# Altium PCB 信号采集板.PcbDoc (part 3 of 4)
Units mil, origin at the board's own origin, x right, y up, seen from the top; angles counter-clockwise.
Board outline 5905.51 x 1775.59 mil, 2 copper layers (Top Layer, Bottom Layer); 203 components, 126 nets, 643 pads, 227 vias.
Unrouted connection lines stored in the file: 2.
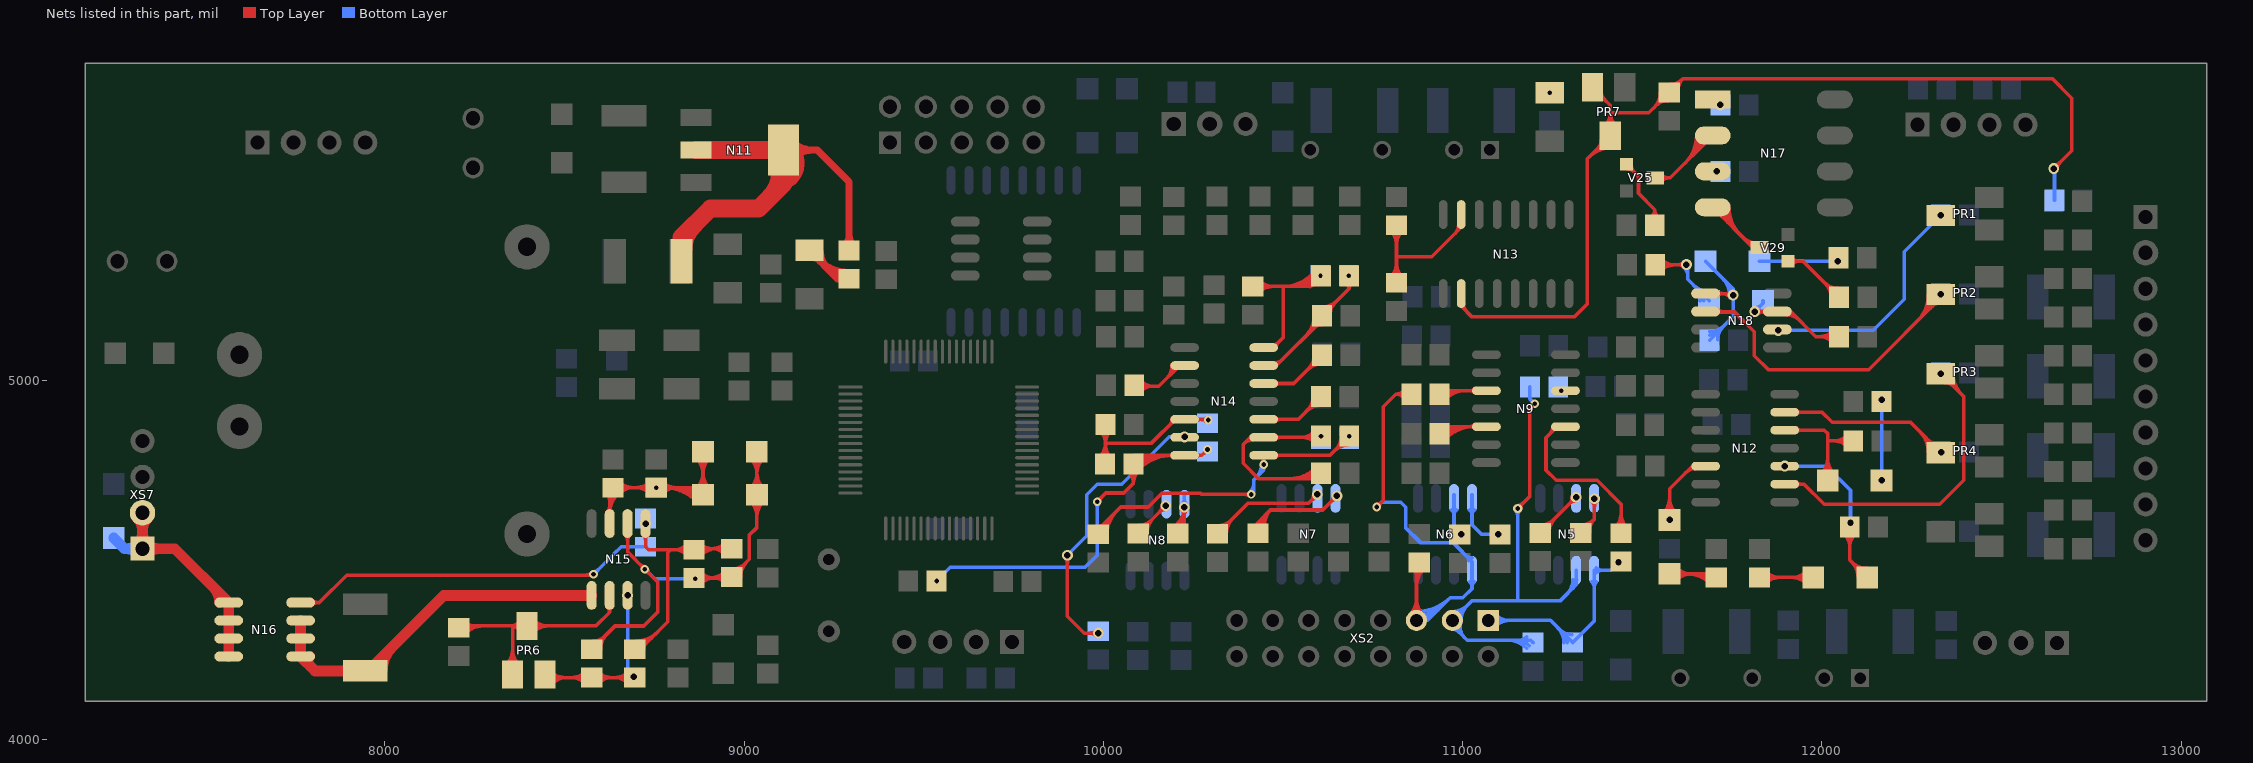
[diagram p3: the nets of this part, all layers, seen from the top]

## Via types
v1: diameter 24, hole 13, Top Layer to Bottom Layer, 112 vias
v2: diameter 30, hole 18, Top Layer to Bottom Layer, 58 vias
v3: diameter 25, hole 12, Top Layer to Bottom Layer, 22 vias
v4: diameter 26, hole 13, Top Layer to Bottom Layer, 17 vias
v5: diameter 35, hole 20, Top Layer to Bottom Layer, 12 vias
v6: diameter 40, hole 25, Top Layer to Bottom Layer, 2 vias
v7: diameter 30, hole 20, Top Layer to Bottom Layer, 2 vias
v8: diameter 25, hole 15, Top Layer to Bottom Layer, 2 vias

## Nets (pads, with @x,y where several pads share a name; then routed paths per layer and width w, separated by ;. In a path a pad name is that pad's centre, name@x,y a point inside that pad or via, vN(x,y) a via of type N, cw(c..) or ccw(c..) an arc to the next point about the centre after c; other vN are vias at no path point) (continued)
NetC47_1: C47.1 N14.2 R41.1 R43.1 | length 889.6
  Top Layer w10: 10390.18,4823.18 cw(c10418.16,4795.19) N14.2@10418.16,4834.77 ; N14.2@10479.11,4836.82 cw(c10491.06,4824.87) 10491.06,4841.77 cw(c10491.06,4858.67) N14.2@10479.11,4846.72 ; 10520.08,4727 ccw(c10520.08,4825.95) R41.1@10590.05,4755.98 ; 10544.22,4727 ccw(c10544.22,4801.81) R41.1@10597.12,4748.91 ; 10547.43,4841.77 ccw(c10547.43,4901.59) R43.1@10589.73,4859.29 ; 10555.01,4841.77 cw(c10555.01,4792.67) R43.1@10589.73,4827.39 ; 10568.36,4727 ccw(c10568.36,4777.67) R41.1@10604.19,4741.84 ; 10571.57,4841.77 ccw(c10571.57,4877.45) R43.1@10596.8,4852.22 ; R43.1@10580.24,4841.77 ccw(c10580.24,4870.75) R43.1@10600.74,4850.26 ; v1(10605.68,4845.31) 10602.15,4841.77 N14.2@10446.16,4841.77 10408.77,4841.77 10389,4822 10389,4770 10432,4727 10591,4727 R41.1@10606,4742
NetC47_2: C47.2 N14.1 R43.2 R46.1 | length 1419.2
  Top Layer w10: R46.1@9986,4572 9986,4585.54 10048.46,4648 10125.2,4648 10164,4686.8 10270,4686.8 10273.8,4683 10378,4683 v1(10412,4683) ; R46.1@9987.97,4594.56 ccw(c9987.97,4611.57) R46.1@10000,4599.54 ; R46.1@9990.53,4572 cw(c10034.15,4572) 10003.31,4602.85 ; R46.1@10000.53,4572 cw(c10068.3,4572) 10020.38,4619.92 ; R46.1@10010.53,4572 cw(c10102.44,4572) 10037.45,4636.99 ; v1@10407.05,4678.05 ccw(c10395.1,4666.1) 10395.1,4683 ccw(c10395.1,4699.9) v1@10407.05,4687.95 ; N14.1@10416.63,4791.77 N14.1@10446.16,4791.77 ; v1@10441.21,4771.11 ccw(c10429.26,4783.06) 10446.16,4783.06 ccw(c10463.06,4783.06) v1@10451.11,4771.11 ; N14.1@10441.21,4786.82 cw(c10429.26,4774.87) 10446.16,4774.87 cw(c10463.06,4774.87) N14.1@10451.11,4786.82 ; v1(10446.16,4766.16) N14.1@10446.16,4791.77 ; N14.1@10479.11,4786.82 cw(c10491.06,4774.87) 10491.06,4791.77 cw(c10491.06,4808.67) N14.1@10479.11,4796.72 ; 10642.55,4803.44 cw(c10684.43,4761.56) R43.2@10684.43,4820.78 ; 10647.31,4808.19 ccw(c10612.16,4843.34) R43.2@10661.87,4843.34 ; R43.2@10659.63,4820.51 cw(c10684.43,4795.71) R43.2@10684.43,4830.78 ; R43.2@10677.43,4845.31 cw(c10660.53,4845.31) 10672.48,4833.36 cw(c10684.43,4821.41) R43.2@10684.43,4838.31 ; v1(10684.43,4845.31) 10630.89,4791.77 N14.1@10446.16,4791.77
  Bottom Layer w10: v1@10407.05,4687.95 ccw(c10377.98,4717.02) 10419.09,4717.02 ; v1(10412,4683) 10419.09,4690.09 10419.09,4724.09 10446.16,4751.16 v1(10446.16,4766.16) ; v1@10414.12,4680.88 ccw(c10402.12,4692.88) 10419.09,4692.88 ; 10426.59,4731.59 ccw(c10395.89,4762.3) v1@10439.18,4765.63 ; 10441.97,4746.97 ccw(c10424.44,4764.49) v1@10449.15,4766.39
NetC48_1: C48.1 N13.15 R40.1 | length 704
  Top Layer w10: C48.1@10800.05,5287.95 ccw(c10761.54,5326.46) 10816,5326.46 ccw(c10870.46,5326.46) C48.1@10831.95,5287.95 ; R40.1@10800.05,5416.05 cw(c10761.54,5377.54) 10816,5377.54 cw(c10870.46,5377.54) R40.1@10831.95,5416.05 ; C48.1@10807.12,5280.88 ccw(c10785.68,5302.32) 10816,5302.32 ccw(c10846.32,5302.32) C48.1@10824.88,5280.88 ; R40.1@10807.12,5423.12 cw(c10785.68,5401.68) 10816,5401.68 cw(c10846.32,5401.68) R40.1@10824.88,5423.12 ; C48.1@10816,5272 10816,5344.28 ; R40.1@10816,5432 10816,5344.28 ; 10978.57,5408.82 ccw(c10953.4,5434) N13.15@10989,5434 ; N13.15@10996,5462 10996,5426.25 10914.03,5344.28 10816,5344.28
NetC49_2: C49.2 N13.2 PR7.1 PR7.W R84.2 | length 3335.3
  Top Layer w10: N13.2@10996,5242 10996,5207 11026,5177 11311,5177 11347.1,5213.1 11347.1,5617.1 PR7.W@11411,5681 11411,5745 ; N13.2@11003,5214 ccw(c11036.8,5214) 11012.9,5190.1 ; 11352.33,5622.33 cw(c11411,5563.65) PR7.W@11411,5646.63 ; PR7.1@11361,5816 11411,5766 11411,5745 ; PR7.1@11361.76,5791.65 cw(c11364.41,5741.33) 11400.04,5776.96 ; 11369.4,5639.4 cw(c11411,5597.8) PR7.W@11411,5656.63 ; 11376.09,5646.09 ccw(c11351.02,5671.16) PR7.W@11386.47,5671.16 ; PR7.1@11385.53,5806.16 ccw(c11420.98,5806.16) 11395.91,5781.09 ; PR7.W@11394.82,5709.28 ccw(c11363.48,5745) 11411,5745 ; PR7.W@11401.42,5701.76 ccw(c11382.85,5722.92) 11411,5722.92 ccw(c11439.15,5722.92) PR7.W@11420.58,5701.76 ; PR7.W@11427.18,5709.28 cw(c11458.52,5745) 11411,5745 ; 11533.13,5759.87 ccw(c11491.26,5801.74) R84.2@11550.47,5801.74 ; 11537.88,5764.62 cw(c11573.03,5729.47) R84.2@11573.03,5779.18 ; R84.2@11550.2,5776.94 ccw(c11525.4,5801.74) R84.2@11560.47,5801.74 ; R84.2@11576.97,5824.3 ccw(c11576.97,5874.01) 11612.12,5838.86 ; R84.2@11589.5,5802.5 cw(c11618.29,5804.25) R84.2@11597.9,5824.64 ; R84.2@11599.49,5803.11 cw(c11647.9,5806.05) 11613.6,5840.34 ; v2(12644.98,5589.72) 12695,5639.74 12695,5786 12640.65,5840.35 11613.61,5840.35 ; v2@12644.98,5599.72 ccw(c12644.98,5623.86) 12662.05,5606.79 ccw(c12679.12,5589.72) v2@12654.98,5589.72 ; 11411,5745 11518.26,5745 R84.2@11575,5801.74 11613.61,5840.35
  Bottom Layer w10: v2(12644.98,5589.72) 12647.26,5587.43 C49.2@12647.26,5502
NetC60_1: C60.1 N12.6 PR4.W | length 686.2
  Top Layer w10: N12.6@11896.16,4911.77 12000.09,4911.77 12028.2,4883.65 12246.28,4883.65 PR4.W@12330.84,4799.09 ; N12.6@11929.11,4906.82 cw(c11941.06,4894.87) 11941.06,4911.77 cw(c11941.06,4928.67) N12.6@11929.11,4916.72 ; 12272.17,4857.76 cw(c12213.5,4799.09) PR4.W@12296.47,4799.09 ; 12289.24,4840.69 cw(c12247.64,4799.09) PR4.W@12306.47,4799.09 ; 12295.93,4834 ccw(c12321,4859.07) PR4.W@12321,4823.61 ; PR4.W@12310.18,4819.75 ccw(c12331.35,4840.92) PR4.W@12331.35,4810.98 ; PR4.W@12315.98,4813.95 cw(c12303.01,4800.98) PR4.W@12321.35,4800.98
  Bottom Layer w20: C60.1@12330.33,4800.74 12331.12,4800.74 v2(12331.35,4800.98)
NetC61_1: C61.1 N14.12 R56.1 R59.1 | length 751.8
  Top Layer w10: R59.1@9989.22,4786.09 ccw(c9950.16,4826) 10006,4826 ; R56.1@9991.06,4859.12 cw(c9961.81,4826) 10006,4826 ; R59.1@9996.21,4778.94 ccw(c9973.44,4802.21) 10006,4802.21 ; R56.1@9997.69,4866.62 cw(c9981.4,4848.18) 10006,4848.18 cw(c10030.6,4848.18) R56.1@10014.31,4866.62 ; R59.1@10006,4792 10006,4826 ; 10006,4797.87 ccw(c10032.91,4797.87) R59.1@10013.88,4778.85 ; 10006,4822.02 ccw(c10057.05,4822.02) R59.1@10020.95,4785.92 ; R56.1@10006,4902 R56.1@10006,4878 10006,4826 ; R56.1@10020.94,4859.12 ccw(c10050.19,4826) 10006,4826 ; 10185.08,4877.08 ccw(c10170.39,4891.77) N14.12@10191.16,4891.77 ; 10188.95,4880.95 cw(c10198.16,4871.74) N14.12@10198.16,4884.77 ; N14.12@10259.11,4886.82 cw(c10271.06,4874.87) 10271.06,4891.77 cw(c10271.06,4908.67) N14.12@10259.11,4896.72 ; 10270.83,4891.77 cw(c10270.83,4868.83) v1@10287.05,4885.05 ; 10279.37,4891.77 ccw(c10279.37,4902.63) v1@10287.05,4894.95 ; v1(10292,4890) 10290.23,4891.77 N14.12@10226.16,4891.77 10199.77,4891.77 10134,4826 10006,4826
NetC61_2: C61.2 N14.14 R59.2 R61.1 | length 1596.4
  Top Layer w10: v1(9983,4663) 10007,4687 10057,4687 10083.74,4713.74 ; v1@9983,4670 ccw(c9983,4686.9) 9994.95,4674.95 ccw(c10006.9,4663) v1@9990,4663 ; R59.2@10068.26,4749.62 cw(c10034.42,4713.74) 10083.74,4713.74 ; R59.2@10075.12,4756.9 cw(c10056.28,4736.92) 10083.74,4736.92 cw(c10111.2,4736.92) R59.2@10092.36,4756.9 ; R59.2@10078,4771 R59.2@10085,4771 ; R59.2@10078.48,4775.23 cw(c10118.41,4735.3) 10118.41,4791.77 ; R59.2@10083.74,4768 10083.74,4713.74 ; R59.2@10084.74,4792 10084.97,4791.77 N14.14@10226.16,4791.77 10273.77,4791.77 v1(10290,4808) ; R59.2@10085.55,4768.16 cw(c10142.55,4711.16) 10142.55,4791.77 ; R59.2@10092.62,4761.09 cw(c10166.69,4687.02) 10166.69,4791.77 ; R59.2@10099.22,4749.62 ccw(c10133.06,4713.74) 10083.74,4713.74 ; R59.2@10099.69,4754.02 cw(c10190.83,4662.88) N14.14@10190.83,4791.77 ; N14.14@10193.21,4786.82 ccw(c10181.26,4774.87) 10181.26,4791.77 ccw(c10181.26,4808.67) N14.14@10193.21,4796.72 ; N14.14@10259.11,4786.82 cw(c10271.06,4774.87) 10271.06,4791.77 cw(c10271.06,4808.67) N14.14@10259.11,4796.72 ; v1@10283,4808 cw(c10266.1,4808) 10278.05,4796.05 cw(c10290,4784.1) v1@10290,4801
  Bottom Layer w10: v1(9536,4442) 9574,4480 9949,4480 9981.5,4512.5 9983,4514 v1(9983,4663) ; v1@9536,4449 ccw(c9536,4465.9) 9547.95,4453.95 ccw(c9559.9,4442) v1@9543,4442 ; v1@9978.05,4658.05 cw(c9966.1,4646.1) 9983,4646.1 cw(c9999.9,4646.1) v1@9987.95,4658.05
NetC62_1: C62.1 N14.6 R58.1 R60.1 | length 696.4
  Top Layer w10: N14.6@10446.16,5041.77 10481.6,5041.77 10608.44,5168.61 R58.1@10608.44,5180.19 10684.19,5255.94 ; N14.6@10474.16,5048.77 ccw(c10474.16,5083.61) 10498.8,5058.97 ; 10563.14,5123.31 ccw(c10508.23,5178.22) R58.1@10585.88,5178.22 ; 10580.21,5140.38 ccw(c10542.37,5178.22) R58.1@10595.88,5178.22 ; 10586.33,5146.5 cw(c10608.44,5124.39) R58.1@10608.44,5155.66 ; R58.1@10608.44,5194.72 ccw(c10608.44,5229.79) R58.1@10633.24,5204.99 ; R58.1@10608.44,5204.72 ccw(c10608.44,5263.93) 10650.31,5222.06 ; R58.1@10631,5182.16 cw(c10680.71,5182.16) 10645.56,5217.31 ; R60.1@10675.91,5268.1 cw(c10671.11,5255.94) 10684.19,5255.94 ; R60.1@10677.7,5286.7 cw(c10662.02,5271.02) R60.1@10684.19,5271.02 ; R60.1@10684.19,5276.76 cw(c10698.24,5276.76) R60.1@10688.3,5286.7 ; R60.1@10684.19,5291.06 10684.19,5255.94 ; R60.1@10692.47,5268.1 ccw(c10697.26,5255.94) 10684.19,5255.94
  other v3: 10683,5292
NetC62_2: C62.2 N14.7 R60.2 R63.1 | length 958.2
  Top Layer w10: R63.1@10416,5262 10500.65,5262 ; R63.1@10426.85,5253.12 cw(c10448.29,5231.68) 10448.29,5262 cw(c10448.29,5292.32) R63.1@10426.85,5270.88 ; R63.1@10433.92,5246.05 cw(c10472.43,5207.54) 10472.43,5262 cw(c10472.43,5316.46) R63.1@10433.92,5277.95 ; N14.7@10446.16,5091.77 10472.54,5091.77 10500.65,5119.87 10500.65,5262 ; N14.7@10474.16,5098.77 ccw(c10474.16,5111.75) 10483.34,5102.57 ; N14.7@10481.16,5091.77 cw(c10501.98,5091.77) 10487.26,5106.49 ; 10521.76,5262 ccw(c10521.76,5357.6) R60.2@10595.73,5297.04 ; 10542.87,5262 ccw(c10542.87,5340.32) R60.2@10603.47,5290.71 ; 10563.98,5262 ccw(c10563.98,5323.03) R60.2@10611.21,5284.37 ; R60.2@10583.2,5285.36 cw(c10555.68,5280.75) 10575.41,5261.02 cw(c10592.85,5243.58) R60.2@10599.43,5267.35 ; R60.2@10587.99,5303.38 cw(c10500.65,5374.88) 10500.65,5262 ; R60.2@10589.95,5275.55 ccw(c10573.5,5292) R60.2@10596.76,5292 ; R60.2@10595.1,5280.71 cw(c10604.26,5271.54) R60.2@10604.26,5284.5 ; R60.2@10605.45,5291.06 10576.39,5262 10500.65,5262
  other v3: 10604.26,5292
NetC63_1: C63.1 N12.2 PR3.W | length 1075.9
  Top Layer w10: N12.2@11896.16,4711.77 11950.23,4711.77 12006.69,4655.31 12327.42,4655.31 12394.35,4722.24 12394.35,4955.58 v2(12330.84,5019.09) ; N12.2@11929.11,4706.82 cw(c11941.06,4694.87) 11941.06,4711.77 cw(c11941.06,4728.67) N12.2@11929.11,4716.72 ; PR3.W@12330.84,5009.09 cw(c12330.84,4984.94) 12347.91,5002.02 cw(c12364.98,5019.09) PR3.W@12340.84,5019.09 ; PR3.W@12340.69,4994.56 cw(c12340.69,4959.11) 12365.75,4984.18 ; PR3.W@12355.21,5019.07 ccw(c12413.83,5019) 12372.38,4977.55 ; PR3.W@12365.21,5019.06 ccw(c12447.87,5018.95) 12389.42,4960.51
NetC65_1: C65.1 N18.2 PR1.W | length 702.3
  Top Layer w10: PR1.W@12330.84,5459.09 v2(12330.84,5460.23)
  Bottom Layer w10: v2(11878.6,5139.56) 12142.38,5139.56 12228.99,5226.17 12228.99,5358.38 v2(12330.84,5460.23) C65.1@12330.33,5460.74 ; C65.1@12320.84,5460.23 cw(c12296.7,5460.23) 12313.77,5443.16 cw(c12330.84,5426.09) C65.1@12330.84,5450.23
NetC66_1: C66.1 N15.3 R72.1 R73.1 V26.A V27.K | length 1715.7
  Top Layer w10: R72.1@8617.69,4685.81 cw(c8597.61,4665.74) 8626,4665.74 ; N15.3@8619.64,4634.36 ccw(c8604.27,4649.73) 8626,4649.73 ccw(c8647.73,4649.73) N15.3@8632.36,4634.36 ; N15.3@8626,4602 8626,4692.16 R72.1@8635.61,4701.76 ; N15.3@8626,4628.86 cw(c8706.54,4628.86) R72.1@8649.59,4685.81 ; 8626,4653 cw(c8682.4,4653) R72.1@8642.52,4692.88 ; R72.1@8646,4691.37 R72.1@8635.61,4701.76 ; R72.1@8646.46,4692.88 cw(c8667.89,4671.44) 8667.89,4701.76 cw(c8667.89,4732.08) R72.1@8646.46,4710.64 ; R72.1@8653.53,4685.81 cw(c8692.04,4647.3) 8692.04,4701.76 cw(c8692.04,4756.23) R72.1@8653.53,4717.72 ; R73.1@8737.32,4701.76 ccw(c8737.32,4720.68) R73.1@8750.7,4707.3 ; R73.1@8737.69,4685.81 ccw(c8699.18,4647.3) 8699.18,4701.76 ccw(c8699.18,4756.23) R73.1@8737.69,4717.72 ; R73.1@8738.46,4701.76 cw(c8738.46,4684.46) R73.1@8750.7,4696.7 ; R73.1@8744.76,4692.88 ccw(c8723.32,4671.44) 8723.32,4701.76 ccw(c8723.32,4732.08) R73.1@8744.76,4710.64 ; R73.1@8761.3,4696.7 cw(c8773.54,4684.46) R73.1@8773.54,4701.76 ; R73.1@8761.3,4707.3 ccw(c8774.68,4720.68) R73.1@8774.68,4701.76 ; R73.1@8766.46,4692.88 cw(c8787.89,4671.44) 8787.89,4701.76 cw(c8787.89,4732.08) R73.1@8766.46,4710.64 ; R73.1@8773.53,4685.81 cw(c8812.04,4647.3) 8812.04,4701.76 cw(c8812.04,4756.23) R73.1@8773.53,4717.72 ; R73.1@8777.17,4701.76 cw(c8777.17,4573.17) V27.K@8868.1,4664.1 ; 8801.31,4701.76 cw(c8801.31,4597.31) V27.K@8875.17,4671.17 ; 8825.45,4701.76 cw(c8825.45,4621.45) V27.K@8882.24,4678.24 ; 8849.6,4701.76 cw(c8849.6,4645.6) V27.K@8889.31,4685.31 ; V26.A@8867.71,4783.86 cw(c8823.54,4739.7) 8886,4739.7 ; V27.K@8868.1,4699.9 ccw(c8824.88,4743.12) 8886,4743.12 ccw(c8947.12,4743.12) V27.K@8903.9,4699.9 ; V26.A@8874.78,4790.93 cw(c8847.68,4763.84) 8886,4763.84 ; V27.K@8875.17,4692.83 ccw(c8849.03,4718.97) 8886,4718.97 ccw(c8922.97,4718.97) V27.K@8896.83,4692.83 ; V26.A@8885.61,4801.76 8886,4801.37 V27.K@8886,4682 8866.24,4701.76 R73.1@8755.61,4701.76 R72.1@8635.61,4701.76 ; 8886,4741.6 cw(c8945.77,4741.6) V26.A@8903.51,4783.86 ; 8886,4765.74 cw(c8921.63,4765.74) V26.A@8896.44,4790.93
  other v3: 8756,4702
NetC67_1: C67.1 C68.1 N15.1 R74.2 R75.1 | length 1258.1
  Top Layer w10: C67.1@8696,4252 8711.51,4252 8788.05,4328.54 8788.05,4404 8788.05,4521.21 8795.92,4529.09 ; C67.1@8697.97,4254.56 ccw(c8697.97,4293.43) C67.1@8725.46,4265.95 ; C67.1@8697.97,4264.56 ccw(c8697.97,4327.58) 8742.53,4283.02 ; C67.1@8697.97,4274.56 ccw(c8697.97,4361.72) 8759.6,4300.09 ; N15.1@8718.93,4594.93 cw(c8701.86,4577.86) 8726,4577.86 cw(c8750.14,4577.86) N15.1@8733.07,4594.93 ; N15.1@8719.64,4569.64 cw(c8704.27,4554.27) 8726,4554.27 cw(c8747.73,4554.27) N15.1@8732.36,4569.64 ; C67.1@8720.53,4252 cw(c8742.29,4252) 8726.9,4267.39 ; v2(8726,4602) 8726,4537.2 8734.11,4529.09 8795.92,4529.09 ; R75.1@8843.28,4513.13 ccw(c8804.77,4474.62) 8804.77,4529.09 ccw(c8804.77,4583.55) R75.1@8843.28,4545.04 ; R75.1@8850.35,4520.21 ccw(c8828.91,4498.77) 8828.91,4529.09 ccw(c8828.91,4559.41) R75.1@8850.35,4537.97 ; R75.1@8872.05,4520.21 cw(c8900.52,4491.73) 8900.52,4532 ; R75.1@8879.12,4513.13 cw(c8924.66,4467.59) 8924.66,4532 ; R75.1@8879.12,4545.04 ccw(c8910.59,4576.52) 8910.59,4532 ; C68.1@8948.08,4516.05 ccw(c8909.57,4477.54) 8909.57,4532 ccw(c8909.57,4586.46) C68.1@8948.08,4547.95 ; C68.1@8955.15,4523.12 ccw(c8933.71,4501.68) 8933.71,4532 ccw(c8933.71,4562.32) C68.1@8955.15,4540.88 ; C68.1@8966,4532 8864.11,4532 R75.1@8861.2,4529.09 8795.92,4529.09
NetC67_2: C67.2 N15.7 PR6.1 R79.2 | length 1073.5
  Top Layer w10: PR6.1@8446,4182 8454.74,4173.26 R79.2@8576,4173.26 C67.2@8696,4173.26 ; PR6.1@8456.27,4161.88 cw(c8483.73,4134.42) 8483.73,4173.26 ; PR6.1@8456.27,4182.43 ccw(c8478.41,4204.57) 8478.41,4173.26 ; PR6.1@8463.34,4154.81 cw(c8507.88,4110.28) 8507.88,4173.26 ; PR6.1@8463.34,4189.5 ccw(c8502.55,4228.71) 8502.55,4173.26 ; R79.2@8558.08,4157.31 ccw(c8519.57,4118.8) 8519.57,4173.26 ccw(c8519.57,4227.72) R79.2@8558.08,4189.21 ; R79.2@8565.15,4164.38 ccw(c8543.71,4142.94) 8543.71,4173.26 ccw(c8543.71,4203.58) R79.2@8565.15,4182.14 ; R79.2@8586.85,4164.38 cw(c8608.29,4142.94) 8608.29,4173.26 cw(c8608.29,4203.58) R79.2@8586.85,4182.14 ; R79.2@8593.92,4157.31 cw(c8632.43,4118.8) 8632.43,4173.26 cw(c8632.43,4227.72) R79.2@8593.92,4189.21 ; 8665.23,4173.26 ccw(c8665.23,4203.32) C67.2@8686.49,4182.06 ; C67.2@8673.6,4173.26 cw(c8673.6,4155.03) C67.2@8686.49,4167.92 ; C67.2@8678.08,4157.31 ccw(c8639.57,4118.8) 8639.57,4173.26 ccw(c8639.57,4227.72) C67.2@8678.08,4189.21 ; C67.2@8685.15,4164.38 ccw(c8663.71,4142.94) 8663.71,4173.26 ccw(c8663.71,4203.58) C67.2@8685.15,4182.14
  Bottom Layer w10: v2(8676,4402) 8676,4192.55 v2(8693.56,4174.99)
NetC68_2: C68.2 N15.2 R75.2 R79.1 V26.K V27.A | length 2241.9
  Top Layer w10: R79.1@8576,4252 8640.72,4316.72 8721.12,4316.72 8760.49,4356.09 8760.49,4438.77 v1(8724.13,4475.13) 8676,4523.26 N15.2@8676,4602 ; R79.1@8577.97,4274.56 ccw(c8577.97,4324.27) 8613.12,4289.12 ; R79.1@8590.53,4252 cw(c8625.6,4252) R79.1@8600.8,4276.8 ; R79.1@8600.53,4252 cw(c8659.74,4252) 8617.87,4293.87 ; N15.2@8669.64,4569.64 cw(c8654.27,4554.27) 8676,4554.27 cw(c8697.73,4554.27) N15.2@8682.36,4569.64 ; v1@8717.13,4475.13 ccw(c8700.23,4475.13) 8712.18,4487.08 ccw(c8724.13,4499.03) v1@8724.13,4482.13 ; v1@8724.13,4468.13 cw(c8724.13,4451.23) 8736.08,4463.18 cw(c8748.03,4475.13) v1@8731.13,4475.13 ; R75.2@8861.2,4450.35 8963.09,4450.35 C68.2@8966,4453.26 9015,4502.26 9015,4570 9036,4591 V27.A@9036,4682 9035.61,4682.39 V26.K@9035.61,4801.76 ; R75.2@8868.95,4443.05 cw(c8886.56,4425.44) R75.2@8886.56,4450.35 ; R75.2@8872.05,4441.47 cw(c8893.49,4420.03) 8893.49,4450.35 cw(c8893.49,4480.67) R75.2@8872.05,4459.23 ; R75.2@8879.12,4434.39 cw(c8917.63,4395.88) 8917.63,4450.35 cw(c8917.63,4504.81) R75.2@8879.12,4466.3 ; 8902.54,4450.35 ccw(c8902.54,4514.76) C68.2@8948.08,4469.21 ; 8916.6,4450.35 cw(c8916.6,4405.83) C68.2@8948.08,4437.31 ; 8926.68,4450.35 ccw(c8926.68,4490.61) C68.2@8955.15,4462.14 ; C68.2@8967.97,4475.82 ccw(c8967.97,4525.53) 9003.12,4490.38 ; C68.2@8980.53,4453.26 cw(c9015.6,4453.26) C68.2@8990.8,4478.06 ; C68.2@8990.53,4453.26 cw(c9049.74,4453.26) 9007.87,4495.13 ; V26.K@9017.71,4783.86 cw(c8974.49,4740.65) 9035.61,4740.65 cw(c9096.72,4740.65) V26.K@9053.51,4783.86 ; V27.A@9018.1,4664.1 cw(c8974.88,4620.88) 9036,4620.88 cw(c9097.12,4620.88) V27.A@9053.9,4664.1 ; V27.A@9018.1,4699.9 ccw(c8975.83,4742.17) 9035.61,4742.17 ; V26.K@9024.78,4790.93 cw(c8998.63,4764.79) 9035.61,4764.79 cw(c9072.58,4764.79) V26.K@9046.44,4790.93 ; V27.A@9025.17,4671.17 cw(c8999.03,4645.03) 9036,4645.03 cw(c9072.97,4645.03) V27.A@9046.83,4671.17 ; V27.A@9025.17,4692.83 ccw(c8999.98,4718.02) 9035.61,4718.02 ; 9035.61,4719.92 ccw(c9073.92,4719.92) V27.A@9046.83,4692.83 ; 9035.61,4744.07 ccw(c9098.07,4744.07) V27.A@9053.9,4699.9
  Bottom Layer w10: v1@8724.13,4468.13 cw(c8724.13,4451.23) 8736.08,4463.18 cw(c8748.03,4475.13) v1@8731.13,4475.13 ; v1(8724.13,4475.13) 8751.26,4448 v1(8864,4448) ; v1@8859.05,4443.05 ccw(c8847.1,4431.1) 8847.1,4448 ccw(c8847.1,4464.9) v1@8859.05,4452.95
NetC69_1: C69.1 N18.6 PR2.W | length 1136.2
  Top Layer w10: N18.6@11681.75,5190.74 11756.55,5190.74 11811.67,5135.62 11811.67,5069.33 11851,5030 12130,5030 12330.84,5230.84 PR2.W@12330.84,5239.09 ; N18.6@11708.36,5185.64 cw(c11720.69,5173.31) 11720.69,5190.74 ; N18.6@11708.36,5198.36 ccw(c11726.77,5216.77) 11726.77,5190.74 ; 12266.34,5166.34 ccw(c12193.59,5239.09) PR2.W@12296.47,5239.09 ; 12283.41,5183.41 ccw(c12227.73,5239.09) PR2.W@12306.47,5239.09 ; 12300.48,5200.48 ccw(c12261.88,5239.09) PR2.W@12316.47,5239.09 ; 12305.9,5205.9 ccw(c12271.06,5240.74) PR2.W@12320.33,5240.74 ; PR2.W@12310,5210 cw(c12321,5199.01) PR2.W@12321,5214.56 ; PR2.W@12322.97,5222.97 ccw(c12305.2,5240.74) v2(12330.33,5240.74)
NetL1_1: L1.1 N11.2 N11.4 R30.1 | length 1733.5
  Top Layer w20: N11.4@9110.09,5641.45 9203.87,5641.45 9292.38,5552.94 R30.1@9292.38,5362 ; N11.4@9133.65,5617.9 cw(c9190.51,5561.04) 9190.51,5641.45 cw(c9190.51,5721.86) N11.4@9133.65,5665 ; R30.1@9279.96,5374.42 ccw(c9249.99,5404.39) 9292.38,5404.39 ccw(c9334.77,5404.39) R30.1@9304.79,5374.42
  Top Layer w50: L1.1@8826,5332 8826,5397.98 8906.16,5478.14 9040.02,5478.14 9110.09,5548.22 N11.4@9110.09,5641.45 N11.2@8866,5641.45 ; L1.1@8831,5364.5 cw(c8923.91,5364.5) 8858.21,5430.2 ; 9072.85,5510.98 ccw(c9009.27,5574.56) N11.4@9093.04,5607.24 ; N11.4@9097.15,5600.94 cw(c9065.9,5569.69) 9110.09,5569.69 cw(c9154.29,5569.69) N11.4@9123.04,5600.94 ; N11.4@9097.15,5628.5 ccw(c9065.9,5597.25) 9065.9,5641.45 ccw(c9065.9,5685.65) N11.4@9097.15,5654.39 ; 9126.97,5565.1 ccw(c9087.14,5604.93) N11.4@9139.62,5625.41
NetN5_7: N5.7 R9.2 | length 311.4
  Top Layer w10: R9.2@11216.27,4576.09 11216.71,4576.09 v2(11315.61,4674.99) ; R9.2@11218.23,4588.65 ccw(c11218.23,4615.29) R9.2@11237.07,4596.46 ; R9.2@11218.23,4598.65 ccw(c11218.23,4649.43) 11254.14,4613.53 ; R9.2@11230.79,4576.09 cw(c11264.8,4576.09) R9.2@11240.75,4600.14 ; R9.2@11240.79,4576.09 cw(c11298.94,4576.09) 11257.82,4617.21 ; v2@11305.61,4674.99 cw(c11281.46,4674.99) 11298.54,4657.92 cw(c11315.61,4640.85) v2@11315.61,4664.99
NetN5_8: N5.8 R4.2 | length 252.1
  Top Layer w10: R4.2@11328.57,4576.09 11366.79,4614.31 ; R4.2@11330.54,4598.65 ccw(c11330.54,4648.36) 11365.69,4613.21 ; R4.2@11343.07,4576.95 cw(c11371.13,4578.88) R4.2@11351.24,4598.76 ; R4.2@11353.05,4577.64 cw(c11400.22,4580.87) 11366.79,4614.31 ; v2@11359.72,4663.98 cw(c11342.65,4646.91) 11366.79,4646.91 cw(c11390.93,4646.91) v2@11373.86,4663.98 ; v2(11366.79,4671.06) 11366.79,4614.31
NetN6_7: N6.7 R10.2 | length 190
  Bottom Layer w10: N6.7@10969.64,4639.64 cw(c10954.27,4624.27) 10976,4624.27 cw(c10997.73,4624.27) N6.7@10982.36,4639.64 ; N6.7@10976,4682 10976,4593.34 v2(10996.71,4572.63) ; v2@10986.71,4572.63 ccw(c10962.57,4572.63) 10979.64,4589.7 ccw(c10996.71,4606.77) v2@10996.71,4582.63
NetN6_8: N6.8 R7.2 | length 201.4
  Bottom Layer w10: N6.8@11019.64,4639.64 cw(c11004.27,4624.27) 11026,4624.27 cw(c11047.73,4624.27) N6.8@11032.36,4639.64 ; N6.8@11026,4682 11026,4598.46 11051.83,4572.63 v2(11099.07,4572.63)
NetN7_7: N7.7 R11.2 | length 473.6
  Top Layer w10: R11.2@10317.8,4573.73 10403.07,4659 10571.27,4659 v2(10595.13,4682.87) ; R11.2@10319.77,4596.29 ccw(c10319.77,4646) 10354.92,4610.85 ; R11.2@10332.33,4573.73 cw(c10367.4,4573.73) R11.2@10342.6,4598.53 ; R11.2@10342.33,4573.73 cw(c10401.55,4573.73) 10359.68,4615.6 ; v2@10585.13,4682.87 cw(c10560.99,4682.87) 10578.06,4665.8 cw(c10595.13,4648.72) v2@10595.13,4672.87
NetN7_8: N7.8 R5.2 | length 538
  Top Layer w10: R5.2@10424.06,4596.49 ccw(c10421.84,4604.46) 10430.11,4604.46 ; R5.2@10425.13,4572.09 cw(c10455.63,4583.79) 10432.53,4606.88 ; R5.2@10430.11,4574.76 10430.11,4604.46 ; R5.2@10434.47,4575.67 cw(c10471.37,4589.82) 10443.43,4617.77 ; R5.2@10436.17,4596.49 cw(c10438.39,4604.46) 10430.11,4604.46 ; R5.2@10443.81,4579.25 cw(c10487.12,4595.86) 10454.32,4628.67 ; R5.2@10453.14,4582.83 cw(c10502.87,4601.9) 10465.21,4639.56 ; v2@10640.25,4678.93 cw(c10616.11,4678.93) 10633.18,4661.86 cw(c10650.25,4644.79) v2@10650.25,4668.93 ; v2(10650.25,4678.93) 10610.88,4639.56 10465.21,4639.56 ; 10430.11,4604.46 10465.21,4639.56
NetN8_7: N8.7 R12.2 | length 259.5
  Top Layer w10: R12.2@10097.18,4574.6 v2(10173.87,4651.29) ; R12.2@10099.15,4597.16 ccw(c10099.15,4646.87) 10134.3,4611.72 ; R12.2@10111.71,4574.6 cw(c10146.78,4574.6) R12.2@10121.98,4599.4 ; R12.2@10121.71,4574.6 cw(c10180.92,4574.6) 10139.05,4616.47 ; v2@10163.87,4651.29 cw(c10139.73,4651.29) 10156.8,4634.22 cw(c10173.87,4617.15) v2@10173.87,4641.29
NetN8_8: N8.8 R8.2 | length 344.7
  Top Layer w10: R8.2@10196.43,4593.23 ccw(c10159.43,4647.43) v2(10225.06,4647.43) 10225.06,4592.47 R8.2@10207.18,4574.6 ; R8.2@10202.07,4584.97 ccw(c10172.36,4628.49) 10225.06,4628.49 ; R8.2@10207.71,4576.71 ccw(c10185.28,4609.56) 10225.06,4609.56 ; v2@10217.98,4640.36 cw(c10200.91,4623.29) 10225.06,4623.29 cw(c10249.2,4623.29) v2@10232.13,4640.36
  Bottom Layer w10: N8.8@10217.98,4654.5 ccw(c10200.91,4671.58) 10225.06,4671.58 ccw(c10249.2,4671.58) N8.8@10232.13,4654.5 ; v2(10225.06,4647.43) 10225.06,4681.06 N8.8@10226,4682
NetN9_3: N9.3 R25.1 | length 641.5
  Top Layer w10: 11242.96,4851.96 ccw(c11223.15,4871.77) N9.3@11251.16,4871.77 ; N9.3@11286.16,4871.77 11262.77,4871.77 11232,4841 11232,4750.72 11260.49,4722.24 11374.66,4722.24 11440.88,4656.02 R25.1@11440.88,4574.99 ; R25.1@11424.93,4590.94 ccw(c11386.42,4629.45) 11440.88,4629.45 ccw(c11495.34,4629.45) R25.1@11456.83,4590.94 ; R25.1@11432,4583.87 ccw(c11410.56,4605.31) 11440.88,4605.31 ccw(c11471.2,4605.31) R25.1@11449.76,4583.87
NetN9_5: N9.5 R36.1 | length 25
  Top Layer w10: N9.5@11270.8,4967.77 N9.5@11270.8,4971.77 ; v1(11274.8,4971.77) N9.5@11286.16,4971.77
  Bottom Layer w10: R36.1@11270.8,4971.77 11270.8,4967.77 v1(11274.8,4971.77)
NetN9_10: N9.10 R24.1 | length 291
  Top Layer w10: R24.1@10936,4962 10945.77,4971.77 N9.10@11066.16,4971.77 ; R24.1@10944.88,4955.09 cw(c10985.15,4914.82) 10985.15,4971.77 ; R24.1@10951.95,4948.02 cw(c11009.29,4890.67) 11009.29,4971.77 ; R24.1@10951.95,4979.92 ccw(c10971.63,4999.6) 10971.63,4971.77 ; N9.10@11033.21,4966.82 ccw(c11021.26,4954.87) 11021.26,4971.77 ccw(c11021.26,4988.67) N9.10@11033.21,4976.72
NetN9_12: N9.12 R35.1 | length 413.2
  Top Layer w10: R35.1@10930.74,4859.23 cw(c10961.01,4828.96) R35.1@10961.01,4871.77 ; R35.1@10936,4852 10955.77,4871.77 N9.12@11066.16,4871.77 ; R35.1@10937.81,4852.16 cw(c10985.15,4804.82) 10985.15,4871.77 ; R35.1@10944.88,4845.09 cw(c11009.29,4780.67) 11009.29,4871.77 ; R35.1@10951.95,4838.02 cw(c11033.44,4756.53) N9.12@11033.44,4871.77 ; N9.12@11033.21,4866.82 ccw(c11021.26,4854.87) 11021.26,4871.77 ccw(c11021.26,4888.67) N9.12@11033.21,4876.72
NetN12_3: N12.3 R62.2 V20.K | length 872.8
  Top Layer w10: R62.2@12061.31,4574.08 cw(c12022.8,4535.57) 12077.26,4535.57 cw(c12131.72,4535.57) R62.2@12093.21,4574.08 ; R62.2@12068.38,4581.15 cw(c12046.94,4559.71) 12077.26,4559.71 cw(c12107.58,4559.71) R62.2@12086.14,4581.15 ; R62.2@12072.31,4597.05 cw(c12060.38,4585.12) R62.2@12077.26,4585.12 ; R62.2@12077.26,4574.85 cw(c12108.66,4574.85) R62.2@12086.46,4597.05 ; R62.2@12077.26,4602 12077.26,4500.74 V20.K@12126,4452 ; V20.K@12100.69,4452 ccw(c12039.57,4452) 12082.78,4495.22 ccw(c12126,4538.43) V20.K@12126,4477.31 ; V20.K@12110.69,4452 ccw(c12073.71,4452) 12099.86,4478.14 ccw(c12126,4504.29) V20.K@12126,4467.31
  Bottom Layer w10: v2(11896.16,4761.77) 12012.29,4761.77 12079.39,4694.68 v2(12079.39,4604.13) ; v2@11903.23,4754.7 cw(c11920.31,4737.63) 11920.31,4761.77 cw(c11920.31,4785.91) v2@11903.23,4768.84 ; v2@12072.31,4611.2 ccw(c12055.24,4628.27) 12079.39,4628.27 ccw(c12103.53,4628.27) v2@12086.46,4611.2
NetN12_5: N12.5 R49.2 V16.K | length 635.8
  Top Layer w10: N12.5@11896.16,4861.77 12006.78,4861.77 12016,4852.55 V16.K@12016,4722 ; N12.5@11929.11,4856.82 cw(c11941.06,4844.87) 11941.06,4861.77 cw(c11941.06,4878.67) N12.5@11929.11,4866.72 ; V16.K@11998.1,4739.9 ccw(c11954.88,4783.12) 12016,4783.12 ccw(c12077.12,4783.12) V16.K@12033.9,4739.9 ; V16.K@12005.17,4732.83 ccw(c11979.03,4758.97) 12016,4758.97 ccw(c12052.97,4758.97) V16.K@12026.83,4732.83 ; 12019.46,4832 R49.2@12087.26,4832 ; R49.2@12071.31,4816.05 ccw(c12032.8,4777.54) 12032.8,4832 ccw(c12032.8,4886.46) R49.2@12071.31,4847.95 ; R49.2@12078.38,4823.12 ccw(c12056.94,4801.68) 12056.94,4832 ccw(c12056.94,4862.32) R49.2@12078.38,4840.88
NetN12_12: N12.12 R38.2 V10.K | length 436.7
  Top Layer w10: V10.K@11558.1,4629.9 ccw(c11514.88,4673.12) 11576,4673.12 ccw(c11637.12,4673.12) V10.K@11593.9,4629.9 ; V10.K@11565.17,4622.83 ccw(c11539.03,4648.97) 11576,4648.97 ccw(c11612.97,4648.97) V10.K@11586.83,4622.83 ; V10.K@11568.93,4619.07 ccw(c11551.86,4636.14) 11576,4636.14 ccw(c11600.14,4636.14) V10.K@11583.07,4619.07 ; v2(11576,4612) 11576,4699.17 11638.6,4761.77 N12.12@11676.16,4761.77 ; 11619.89,4743.06 cw(c11648.16,4714.79) N12.12@11648.16,4754.77
NetN14_3: N14.3 R48.1 | length 325.5
  Top Layer w10: N14.3@10446.16,4891.77 10542.15,4891.77 R48.1@10605.68,4955.31 ; N14.3@10479.11,4886.82 cw(c10491.06,4874.87) 10491.06,4891.77 cw(c10491.06,4908.67) N14.3@10479.11,4896.72 ; 10563.81,4913.44 cw(c10605.68,4871.56) R48.1@10605.68,4930.78 ; 10568.57,4918.19 ccw(c10533.42,4953.34) R48.1@10583.13,4953.34 ; R48.1@10580.88,4930.51 cw(c10605.68,4905.71) R48.1@10605.68,4940.78
NetN14_5: N14.5 R65.1 | length 334.4
  Top Layer w10: N14.5@10446.16,4991.77 10530.02,4991.77 R65.1@10608.44,5070.19 ; N14.5@10479.11,4986.82 cw(c10491.06,4974.87) 10491.06,4991.77 cw(c10491.06,5008.67) N14.5@10479.11,4996.72 ; 10566.57,5028.32 cw(c10608.44,4986.45) R65.1@10608.44,5045.66 ; 10571.32,5033.07 ccw(c10536.17,5068.22) R65.1@10585.88,5068.22 ; R65.1@10583.64,5045.39 cw(c10608.44,5020.59) R65.1@10608.44,5055.66
NetN14_9: N14.9 R47.1 | length 357.6
  Top Layer w10: R47.1@10086,4984 10154,4984 10211.77,5041.77 N14.9@10226.16,5041.77 ; R47.1@10094.88,4976.15 cw(c10113.83,4957.2) 10113.83,4984 ; R47.1@10094.88,4993.91 ccw(c10118.81,5017.84) 10118.81,4984 ; R47.1@10101.95,4969.08 cw(c10137.97,4933.06) 10137.97,4984 ; R47.1@10101.95,5000.98 ccw(c10142.95,5041.98) 10142.95,4984 ; 10176.59,5006.59 ccw(c10141.42,5041.77) N14.9@10191.16,5041.77 ; 10193.66,5023.66 ccw(c10175.56,5041.77) N14.9@10201.16,5041.77 ; N14.9@10210.74,5040.74 ccw(c10209.7,5041.77) N14.9@10211.16,5041.77
NetN14_13: N14.13 R64.1 | length 919.9
  Top Layer w10: v2@9892.93,4506.93 cw(c9875.86,4489.86) 9900,4489.86 cw(c9924.14,4489.86) v2@9907.07,4506.93 ; v2(9900,4514) 9900,4344 9947,4297 v2(9986,4297) ; v2@9978.93,4289.93 ccw(c9961.86,4272.86) 9961.86,4297 ccw(c9961.86,4321.14) v2@9978.93,4304.07 ; N14.13@10226.16,4841.77 v2(10226.16,4843.18)
  Bottom Layer w10: v2(9900,4514) 9954,4568 9954,4682 9983,4711 10051.04,4711 10183.22,4843.18 v2(10226.16,4843.18) ; v2@10219.09,4836.1 ccw(c10202.02,4819.03) 10202.02,4843.18 ccw(c10202.02,4867.32) v2@10219.09,4850.25
NetN15_5: N15.5 N16.1 N16.2 N16.3 R77.1 | length 1174.3
  Top Layer w30: N16.3@7766,4332 N16.2@7766,4282 N16.1@7766,4232 7806,4192 R77.1@7946,4192 7954.66,4192 8164.66,4402 N15.5@8576,4402 ; N16.1@7791.21,4232.61 ccw(c7807.82,4219.83) 7793,4205 ; R77.1@7902.89,4181.39 ccw(c7877.29,4155.79) 7877.29,4192 ccw(c7877.29,4228.21) R77.1@7902.89,4202.61 ; R77.1@7993.5,4192 cw(c8087.26,4192) 8020.96,4258.3
NetN15_6: N15.6 PR6.2 PR6.W R81.1 | length 1122.6
  Top Layer w10: R81.1@8206,4312 8211,4317 8351.04,4317 ; R81.1@8216.85,4303.12 cw(c8250.36,4269.61) 8250.36,4317 cw(c8250.36,4354.39) R81.1@8223.92,4327.95 ; R81.1@8223.92,4296.05 cw(c8274.5,4245.47) 8274.5,4317 ; PR6.2@8338.66,4209.19 ccw(c8296.79,4251.06) 8356,4251.06 ccw(c8415.21,4251.06) PR6.2@8373.34,4209.19 ; PR6.2@8345.73,4202.11 ccw(c8320.93,4226.91) 8356,4226.91 ccw(c8391.07,4226.91) PR6.2@8366.27,4202.11 ; PR6.2@8356,4182 8356,4312.04 ; PR6.W@8375.38,4303.72 ccw(c8351.04,4288.06) 8351.04,4317 ; PR6.W@8375.38,4330.28 cw(c8351.04,4345.94) 8351.04,4317 ; PR6.W@8406.27,4306.73 cw(c8431.07,4281.93) 8431.07,4317 cw(c8431.07,4352.07) PR6.W@8406.27,4327.27 ; PR6.W@8413.34,4299.66 cw(c8455.21,4257.79) 8455.21,4317 cw(c8455.21,4376.21) PR6.W@8413.34,4334.34 ; N15.6@8619.9,4369.38 cw(c8607.07,4355.47) 8626,4355.47 ; N15.6@8626,4402 8626,4355.46 ; N15.6@8632.1,4369.38 ccw(c8644.93,4355.47) 8626,4355.47 ; 8351.04,4317 PR6.W@8396,4317 8587.54,4317 8626,4355.46
NetN16_4: N16.4 R74.1 | length 1130.2
  Top Layer w10: N16.4@7766,4382 7817.89,4382 7894.35,4458.46 8539,4458.46 v1@8579.39,4458.46 ; N16.4@7798.36,4375.64 cw(c7813.73,4360.27) 7813.73,4382 cw(c7813.73,4403.73) N16.4@7798.36,4388.36 ; 8557.96,4458.46 ccw(c8557.96,4484.04) v1@8576.05,4465.95
  Bottom Layer w10: v1(8581,4461) 8581.93,4461 8658.13,4537.2 ; v1@8581,4468 ccw(c8581,4487.14) 8594.54,4473.61 ; v1@8588,4461 cw(c8602.66,4461) 8592.29,4471.36 ; 8638.44,4517.51 8658.13,4537.2 ; R74.1@8726,4537.2 8658.13,4537.2
NetN16_5: N16.5 N16.6 N16.7 N16.8 V23.A XS7.1 XS7.2 | length 979.5
  Top Layer w30: XS7.2@7311.55,4617.55 cw(c7276.67,4582.67) 7326,4582.67 cw(c7375.33,4582.67) XS7.2@7340.45,4617.55 ; XS7.1@7312.94,4545.06 ccw(c7281.42,4576.58) 7326,4576.58 ccw(c7370.58,4576.58) 7339.06,4545.06 ccw(c7370.58,4576.58) 7370.58,4532 ccw(c7370.58,4487.42) XS7.1@7339.06,4518.94 ; XS7.2@7326,4632 XS7.1@7326,4532 7416,4532 N16.5@7566,4382 N16.6@7566,4332 N16.7@7566,4282 N16.8@7566,4232 ; 7523.32,4424.68 cw(c7480.64,4382) N16.5@7541,4382
  Bottom Layer w30: V23.A@7246,4562 7276,4532 XS7.1@7326,4532 ; XS7.1@7312.94,4518.94 ccw(c7281.42,4487.42) 7281.42,4532 ccw(c7281.42,4576.58) XS7.1@7312.94,4545.06
NetN17_1: N17.1 R66.2 | length 36.3
  Top Layer w10: N17.1@11696,5782 11717.26,5782 v2(11717.26,5767)
NetN17_2: N17.2 V25.3 | length 485.7
  Top Layer w10: V25.3@11536,5564 11578,5564 N17.2@11696,5682 ; V25.3@11552.19,5554.81 cw(c11574.38,5532.62) 11574.38,5564 cw(c11574.38,5595.38) V25.3@11552.19,5573.19 ; 11619.18,5605.18 ccw(c11542.36,5682) N17.2@11651,5682 ; 11636.25,5622.25 ccw(c11576.5,5682) N17.2@11661,5682 ; 11653.32,5639.32 ccw(c11610.64,5682) N17.2@11671,5682 ; 11670.39,5656.39 ccw(c11644.79,5682) N17.2@11681,5682
NetN17_3: N17.3 R76.2
  other v2: 11707.26,5582
NetN17_4: N17.4 V29.3 | length 476
  Top Layer w10: N17.4@11696,5482 11808,5370 V29.3@11826,5370 ; N17.4@11711,5482 ccw(c11747.21,5482) 11721.61,5456.39 ; N17.4@11721,5482 ccw(c11781.36,5482) 11738.68,5439.32 ; N17.4@11731,5482 ccw(c11815.5,5482) 11755.75,5422.25 ; N17.4@11741,5482 ccw(c11849.64,5482) 11772.82,5405.18 ; 11778.03,5399.97 ccw(c11819,5440.94) V29.3@11819,5383 ; 11795.1,5382.9 ccw(c11819,5406.8) V29.3@11819,5373
NetN18_3: N18.3 R70.2 V24.K | length 602.1
  Top Layer w10: v2(11812.93,5192) N18.3@11876,5192 11912.77,5192 11982.77,5122 R70.2@12047.26,5122 ; v2@11820,5184.93 cw(c11837.07,5167.86) 11837.07,5192 cw(c11837.07,5216.14) v2@11820,5199.07 ; N18.3@11843.64,5185.64 ccw(c11828.27,5170.27) 11828.27,5192 ccw(c11828.27,5213.73) N18.3@11843.64,5198.36 ; N18.3@11902,5183 cw(c11902,5135.27) 11935.75,5169.02 ; N18.3@11902,5193 cw(c11902,5169.41) 11918.68,5186.09 ; R70.2@12031.31,5106.05 ccw(c11992.8,5067.54) 11992.8,5122 ccw(c11992.8,5176.46) R70.2@12031.31,5137.95 ; R70.2@12038.38,5113.12 ccw(c12016.94,5091.68) 12016.94,5122 ccw(c12016.94,5152.32) R70.2@12038.38,5130.88
  Bottom Layer w10: v2(11812.93,5192) 11836,5215.07 V24.K@11836,5222 ; V24.K@11812.93,5202 ccw(c11812.93,5226.14) 11830,5209.07 ccw(c11847.07,5192) V24.K@11822.93,5192
NetN18_5: N18.5 R80.2 V28.K | length 613.3
  Top Layer w10: N18.5@11676,5242 v2@11748.6,5242 ; N18.5@11708.36,5235.64 cw(c11723.73,5220.27) 11723.73,5242 cw(c11723.73,5263.73) N18.5@11708.36,5248.36 ; 11718.78,5242 cw(c11718.78,5204.15) v2@11745.54,5230.91
  Bottom Layer w10: V28.K@11676,5332 11752.61,5255.39 v2(11752.61,5237.98) ; R80.2@11687.26,5112 11752.61,5177.35 v2(11752.61,5237.98) ; R80.2@11687.26,5126.53 ccw(c11687.26,5161.6) R80.2@11712.06,5136.8 ; R80.2@11687.26,5136.53 ccw(c11687.26,5195.74) 11729.13,5153.87 ; R80.2@11709.82,5113.97 cw(c11759.53,5113.97) 11724.38,5149.12 ; 11723.24,5284.76 cw(c11676.46,5237.98) v2@11742.61,5237.98 ; 11740.31,5267.69 cw(c11710.6,5237.98) v2(11752.61,5237.98)
NetR30_2: R30.2 V7.1 | length 392
  Top Layer w20: V7.1@9182.38,5362 9261.12,5283.26 ; V7.1@9191.75,5342 cw(c9191.75,5316.34) V7.1@9209.89,5334.48 ; V7.1@9210.43,5333.95 ccw(c9290.41,5413.93) R30.2@9290.41,5300.82 ; V7.1@9211.75,5362 ccw(c9282.65,5362) 9232.52,5311.86 ; 9244.57,5299.8 ccw(c9290.41,5345.64) R30.2@9290.41,5280.82 ; R30.2@9274.92,5274.98 ccw(c9261.12,5267.61) 9261.12,5283.26 ; R30.2@9274.92,5291.53 cw(c9261.12,5298.91) 9261.12,5283.26 ; R30.2@9292.38,5283.26 9261.12,5283.26
NetR37_1: R37.1 V10.A | length 456.1
  Top Layer w10: V10.A@11576,4462 11696,4462 R37.1@11706,4452 ; V10.A@11586.83,4451.17 cw(c11612.97,4425.03) 11612.97,4462 cw(c11612.97,4498.97) V10.A@11586.83,4472.83 ; V10.A@11593.9,4444.1 cw(c11637.12,4400.88) 11637.12,4462 cw(c11637.12,4523.12) V10.A@11593.9,4479.9 ; 11625.43,4462 cw(c11625.43,4373.4) R37.1@11688.08,4436.05 ; 11649.57,4462 cw(c11649.57,4397.54) R37.1@11695.15,4443.12 ; R37.1@11688.08,4467.95 cw(c11673.71,4482.32) 11673.71,4462 cw(c11673.71,4421.68) R37.1@11702.22,4450.19
NetR45_1: R45.1 V16.A | length 236.9
  Top Layer w10: v2(12166,4722) V16.A@12173.64,4722 ; R45.1@12166,4942 v2(12166,4946.65)
  Bottom Layer w10: v2(12166,4722) v2(12166,4946.65)
NetR55_1: R55.1 V19.2
  other v1: 11242,5801
NetR57_1: R57.1 V20.A | length 437.3
  Top Layer w10: R57.1@11826,4452 V20.A@11976,4452 ; R57.1@11836.85,4443.12 cw(c11858.29,4421.68) 11858.29,4452 cw(c11858.29,4482.32) R57.1@11836.85,4460.88 ; R57.1@11843.92,4436.05 cw(c11882.43,4397.54) 11882.43,4452 cw(c11882.43,4506.46) R57.1@11843.92,4467.95 ; V20.A@11958.1,4434.1 ccw(c11914.88,4390.88) 11914.88,4452 ccw(c11914.88,4513.12) V20.A@11958.1,4469.9 ; V20.A@11965.17,4441.17 ccw(c11939.03,4415.03) 11939.03,4452 ccw(c11939.03,4488.97) V20.A@11965.17,4462.83
NetR67_1: R67.1 V24.A | length 576.7
  Top Layer w10: R67.1@11536,5322 v2@11622.86,5322 ; R67.1@11544.88,5313.12 cw(c11566.32,5291.68) 11566.32,5322 cw(c11566.32,5352.32) R67.1@11544.88,5330.88 ; R67.1@11551.95,5306.05 cw(c11590.46,5267.54) 11590.46,5322 cw(c11590.46,5376.46) R67.1@11551.95,5337.95 ; 11597.41,5322 ccw(c11597.41,5347.99) v2@11615.79,5329.61 ; 11600.02,5322 cw(c11600.02,5299.7) v2@11615.79,5315.47
  Bottom Layer w10: v2@11615.79,5315.47 cw(c11589.84,5289.52) 11626.54,5289.52 ; v2(11622.86,5322.54) 11626.54,5318.86 11626.54,5281.46 V24.A@11686,5222 ; 11626.54,5307.28 cw(c11638.12,5307.28) v2@11629.93,5315.47 ; V24.A@11660.69,5222 ccw(c11599.57,5222) 11642.78,5265.22 ccw(c11686,5308.43) V24.A@11686,5247.31 ; V24.A@11670.69,5222 ccw(c11633.71,5222) 11659.86,5248.14 ccw(c11686,5274.29) V24.A@11686,5237.31
NetR71_2: R71.2 V25.1 | length 305.7
  Top Layer w10: V25.1@11456,5589 cw(c11456,5557.62) 11478.19,5579.81 cw(c11500.38,5602) V25.1@11469,5602 ; V25.1@11456,5602 11489.31,5568.69 11489.31,5520.98 11534.74,5475.54 ; R71.2@11522.44,5452.88 ccw(c11507.71,5475.54) 11534.74,5475.54 ; R71.2@11534.74,5432 11534.74,5475.54 ; R71.2@11547.04,5452.88 cw(c11561.77,5475.54) 11534.74,5475.54
NetR78_1: R78.1 V28.A | length 223.7
  Top Layer w10: v2(12043.48,5332) R78.1@12047.89,5336.41
  Bottom Layer w10: V28.A@11826,5332 v2(12043.48,5332)
NetR82_2: R82.2 V29.1 | length 345.1
  Top Layer w10: V29.1@11906,5332 11947.26,5332 R82.2@12047.26,5232 ; V29.1@11915.19,5322.81 cw(c11937.38,5300.62) 11937.38,5332 cw(c11937.38,5363.38) V29.1@11915.19,5341.19 ; 12005.39,5273.87 ccw(c12047.26,5315.74) R82.2@12047.26,5256.53 ; 12010.14,5269.12 cw(c11974.99,5233.97) R82.2@12024.7,5233.97 ; R82.2@12022.46,5256.8 ccw(c12047.26,5281.6) R82.2@12047.26,5246.53
NTC1: C17.2 N5.1 R25.2 XS2.1 | length 896.4
  Top Layer w10: v2(11433.72,4493.89) R25.2@11437.65,4493.89
  Bottom Layer w10: XS2.1@11071.51,4332.47 11244.27,4332.47 C17.2@11306,4270.74 11366,4330.74 N5.1@11366,4472 11411.83,4472 v2(11433.72,4493.89) ; XS2.1@11081.78,4322.2 cw(c11106.58,4297.4) 11106.58,4332.47 cw(c11106.58,4367.54) XS2.1@11081.78,4342.74 ; XS2.1@11088.86,4315.13 cw(c11130.73,4273.26) 11130.73,4332.47 cw(c11130.73,4391.69) XS2.1@11088.86,4349.82 ; 11264.13,4312.61 cw(c11222.26,4270.74) C17.2@11281.47,4270.74 ; 11268.88,4307.86 ccw(c11304.03,4343.01) C17.2@11304.03,4293.3 ; C17.2@11281.2,4295.54 cw(c11256.4,4270.74) C17.2@11291.47,4270.74 ; N5.1@11359.64,4439.64 cw(c11344.27,4424.27) 11366,4424.27 cw(c11387.73,4424.27) N5.1@11372.36,4439.64 ; N5.1@11372.36,4465.64 cw(c11387.73,4450.27) 11387.73,4472 cw(c11387.73,4493.73) N5.1@11372.36,4478.36
NTC2: C18.2 N5.2 R36.2 XS2.3 | length 1810
  Top Layer w10: v4(11153,4644) 11187.26,4678.26 11187.26,4921.26 v1(11201,4935) ; v4@11153,4652 ccw(c11153,4671.31) 11166.66,4657.66 ccw(c11180.31,4644) v4@11161,4644
  Bottom Layer w10: XS2.3@10971.51,4307.94 cw(c10971.51,4282.95) 10989.19,4300.62 ; XS2.3@10971.51,4347 ccw(c10971.51,4382.07) 10996.31,4357.27 ccw(c11021.11,4332.47) XS2.3@10986.04,4332.47 ; XS2.3@10971.51,4357 ccw(c10971.51,4416.21) 11013.38,4374.34 ccw(c11055.25,4332.47) XS2.3@10996.04,4332.47 ; XS2.3@10985.43,4328.31 ccw(c11016.3,4319.08) 10993.52,4296.29 ; XS2.3@10995.01,4325.45 ccw(c11034.55,4313.62) 11005.37,4284.44 ; 11123.6,4277.35 cw(c11123.6,4200.31) C18.2@11178.08,4254.79 ; v4@11147.34,4638.34 cw(c11133.69,4624.69) 11153,4624.69 cw(c11172.31,4624.69) v4@11158.66,4638.34 ; 11147.74,4277.35 cw(c11147.74,4224.45) C18.2@11185.15,4261.86 ; v4(11153,4644) 11153,4387.59 ; 11155.54,4277.35 ccw(c11155.54,4309.23) C18.2@11178.08,4286.69 ; R36.2@11187.26,4982 11187.26,4948.74 v1(11201,4935) ; C18.2@11196,4270.74 11189.39,4277.35 11012.46,4277.35 10971.51,4318.3 XS2.3@10971.51,4332.47 11026.63,4387.59 11153,4387.59 ; 11290.24,4405.53 ccw(c11249.76,4446) N5.2@11307,4446 ; 11307.31,4422.6 ccw(c11283.91,4446) N5.2@11317,4446 ; N5.2@11316,4472 11316,4431.29 11272.3,4387.59 11153,4387.59
NTC3: C19.2 N6.1 R24.2 XS2.5 | length 1917.9
  Top Layer w10: v1(10761,4648) 10779,4666 10779,4927 10814,4962 ; v1@10761,4655 ccw(c10761,4671.9) 10772.95,4659.95 ccw(c10784.9,4648) v1@10768,4648 ; R24.2@10838.76,4949.09 ccw(c10814,4931.8) 10814,4962 ; R24.2@10838.76,4974.91 cw(c10814,4992.2) 10814,4962 ; XS2.5@10854.17,4349.82 ccw(c10812.3,4391.69) 10871.51,4391.69 ccw(c10930.73,4391.69) XS2.5@10888.86,4349.82 ; R24.2@10857.26,4962 10814,4962 ; XS2.5@10861.24,4342.74 ccw(c10836.44,4367.54) 10871.51,4367.54 ccw(c10906.58,4367.54) XS2.5@10881.78,4342.74 ; C19.2@10861.42,4477.86 cw(c10837.07,4453.5) 10871.51,4453.5 ; XS2.5@10871.51,4332.47 10871.51,4485.98 C19.2@10879.34,4493.81 ; 10871.51,4425.2 cw(c10945.99,4425.2) C19.2@10893.33,4477.86 ; 10871.51,4449.34 cw(c10921.85,4449.34) C19.2@10886.25,4484.93
  Bottom Layer w10: v1(10761,4648) 10774,4661 10828,4661 ; 10830.52,4658.48 10842,4647 10842,4589.54 10882.54,4549.01 10973.09,4549.01 11026,4496.09 N6.1@11026,4472 ; XS2.5@10871.48,4327 ccw(c10871.81,4387.21) 10914.38,4344.63 ; XS2.5@10871.51,4332.47 10902.22,4332.47 10965.21,4395.46 ; XS2.5@10871.54,4337 ccw(c10871.99,4420.91) 10931.32,4361.58 ; XS2.5@10871.59,4347 ccw(c10872.17,4454.61) 10948.27,4378.52 ; XS2.5@10871.64,4357 ccw(c10872.35,4488.31) 10965.21,4395.46 ; 11007.38,4514.71 ccw(c11026,4533.33) N6.1@11026,4507 ; 11011.98,4510.11 cw(c10999.87,4498) N6.1@11017,4498 ; N6.1@11019.64,4439.64 cw(c11004.27,4424.27) 11026,4424.27 cw(c11047.73,4424.27) N6.1@11032.36,4439.64 ; N6.1@11026,4482 N6.1@11026,4472 ; 10965.21,4395.46 11000.65,4395.46 11026,4420.82 N6.1@11026,4472